# Altium PCB LMG1210BOB.PcbDoc
Units mil, origin at the board's own origin, x right, y up, seen from the top; angles counter-clockwise.
Board outline 700 x 1200 mil, 2 copper layers (Top Layer, Bottom Layer), stack 61.756 mil thick; 3 components, 26 nets, 43 pads, 0 vias.
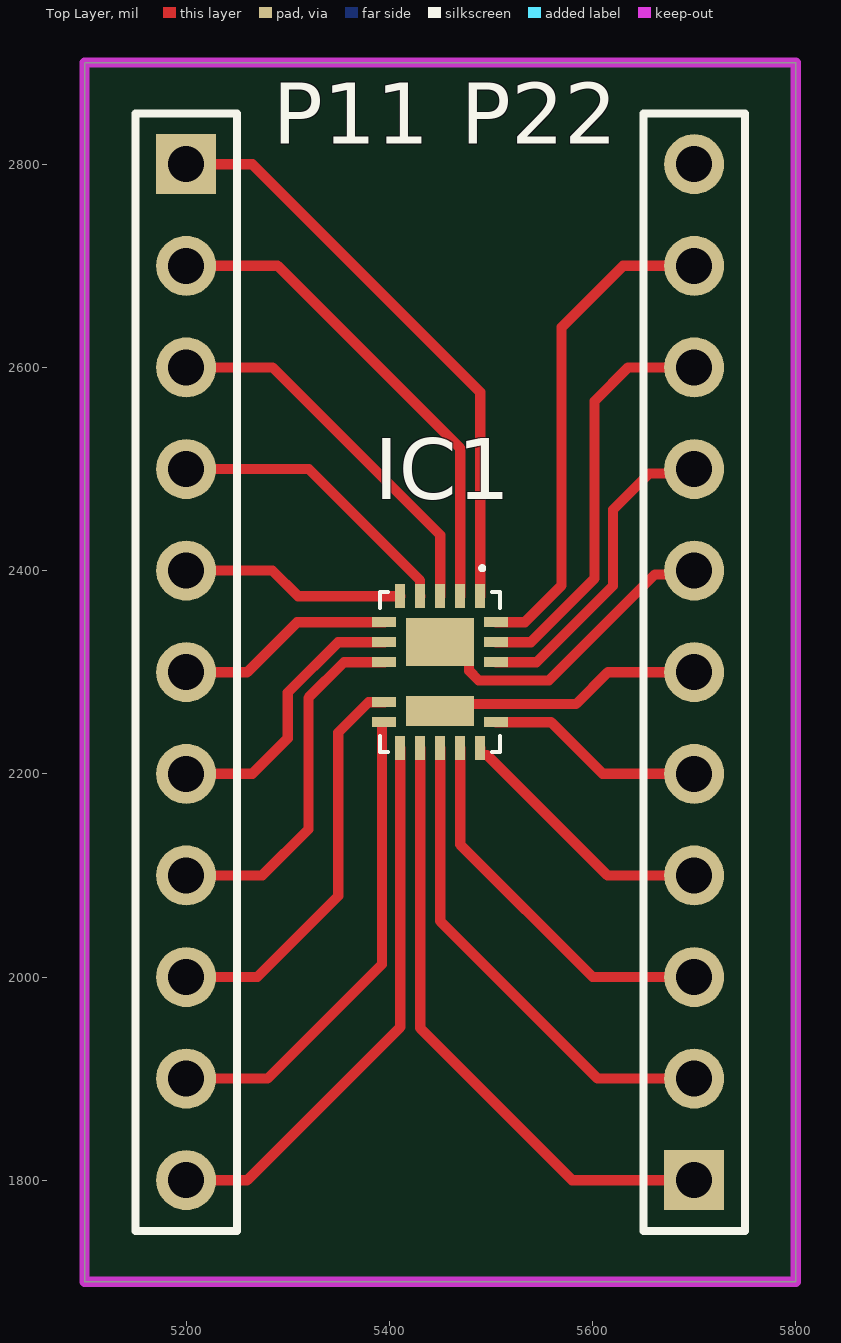
[diagram p0: Top Layer view]
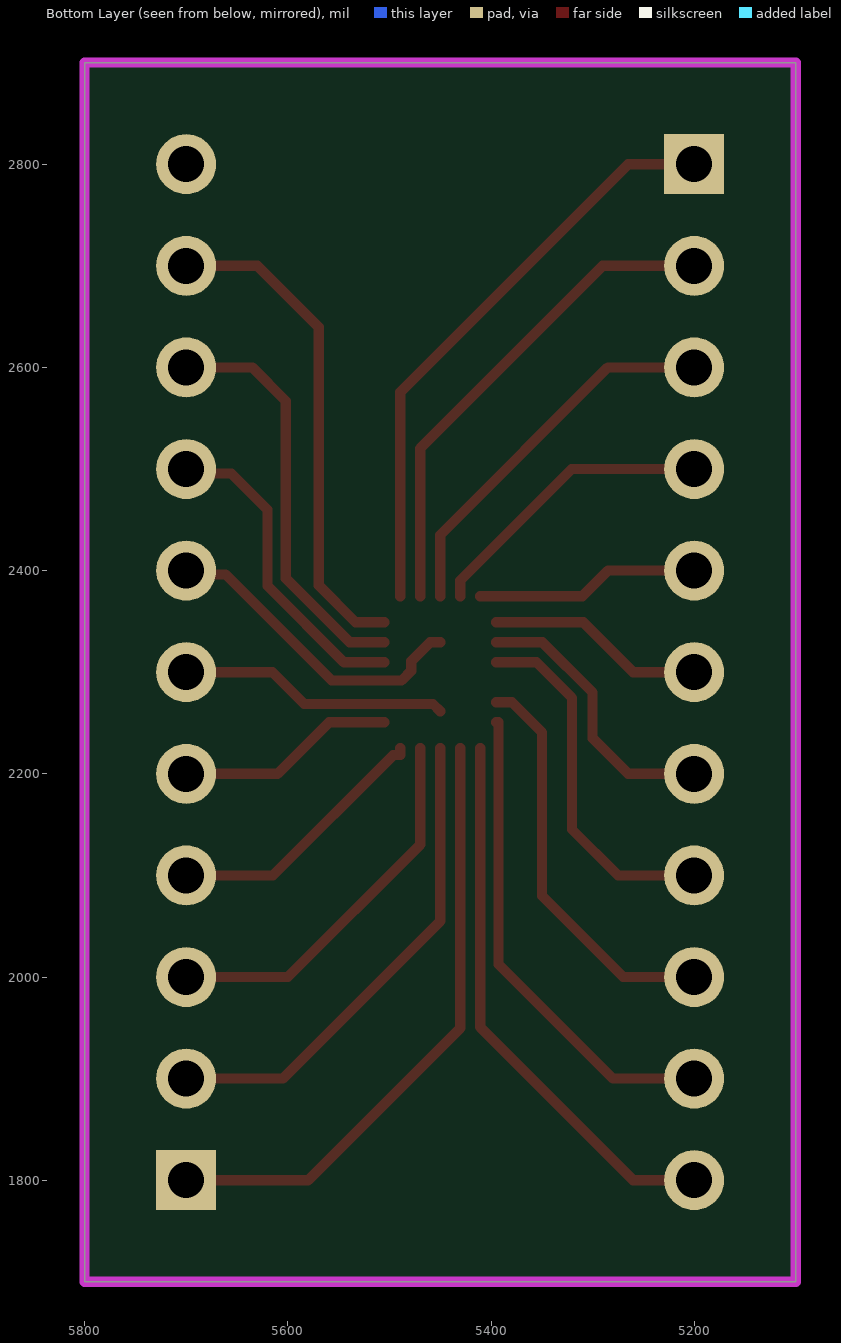
[diagram p1: Bottom Layer view, seen from below]

## Layer stack, top to bottom
Top Solder: solder mask 1, SM-001, Dk 4
Top Layer: signal copper 1.378
Dielectric 1: core 59, Core-043, Dk 4.3
Bottom Layer: signal copper 1.378
Bottom Solder: solder mask 1, SM-001, Dk 4

## Board outline
5100,1700 5800,1700 5800,2900 5100,2900

## Design rules (kind name [scope] priority, off if disabled: settings)
BoardOutlineClearance [All] p1: gap=7.87 ignorepadtopadclearanceinfootprint=FALSE except(15.75: Arc-SplitBarrior Arc-SplitContinuation Track-SplitBarrior Track-SplitContinuation SMDPad-SplitBarrior SMDPad-SplitContinuation THPad-SplitBarrior THPad-SplitContinuation Via-SplitBarrior Via-SplitContinuation Fill-SplitBarrior Fill-SplitContinuation Poly-SplitBarrior Poly-SplitContinuation Region-SplitBarrior Region-SplitContinuation Text-SplitBarrior Text-SplitContinuation)
Clearance "Clearance Bottom Layer" [OnLayer('Bottom Layer')] p1: gap=8 ignorepadtopadclearanceinfootprint=TRUE except(10: Arc-Text Track-Text SMDPad-Text THPad-Text Via-Text Fill-Text Poly-Text Region-Text Text-Text)
Clearance "Clearance Top Layer" [OnLayer('Top Layer')] p2: gap=8 ignorepadtopadclearanceinfootprint=TRUE except(10: Arc-Text Track-Text SMDPad-Text THPad-Text Via-Text Fill-Text Poly-Text Region-Text Text-Text)
Clearance [All] p3: gap=7.87 ignorepadtopadclearanceinfootprint=FALSE except(3.5: Arc-Arc Arc-Track Arc-SMDPad Track-Track Track-SMDPad SMDPad-SMDPad; 5: Arc-Via Track-Via SMDPad-Via THPad-Via Via-Via; 10: Arc-Text Track-Text SMDPad-Text THPad-Text Via-Text Fill-Text Poly-Text Region-Text Text-Text)
HoleSize [All] p1: absolutevalues=TRUE maxlimit=248.03 minlimit=7.87 maxpercent=80.000 minpercent=20.000
MinimumAnnularRing [All] p1: minimumring=3
MinimumSolderMaskSliver [All] p1: minsoldermaskwidth=3.94
PolygonConnect PolygonConnect_1 [All] p1: thpad.connectstyle=Relief thpad.reliefconductorwidth=20 thpad.reliefentries=4 thpad.polygonreliefangle="90 Angle" thpad.airgapwidth=10 smdpad.connectstyle=Relief smdpad.reliefconductorwidth=20 smdpad.reliefentries=4 smdpad.polygonreliefangle="90 Angle" smdpad.airgapwidth=10 via.connectstyle=Direct via.reliefconductorwidth=20 via.reliefentries=4 via.polygonreliefangle="90 Angle" via.airgapwidth=10
RoutingCorners [All] p1: cornerstyle=Round minsetback=100 maxsetback=100
RoutingVias [All] p1: holewidth=19.68 width=39.37 viastyle="Through Hole" minholewidth=7.87 minwidth=17.72 maxholewidth=39.37 maxwidth=78.74
SilkToSilkClearance [All] p1: silktosilkclearance=3.94
SilkToSolderMaskClearance [IsPad] p1: minsilkscreentomaskgap=3.94 clearancetoexposedcopper=TRUE
SolderMaskExpansion [All] p1: expansion=4 istentingtop=FALSE
Width [All] p1: maxlimit=100 minlimit=3.5 preferedwidth=10
25 further rules are at their usual default settings.

## Components (designator, comment, footprint, x,y, rotation, side; value= is the part's Value field where it differs from the comment)
IC1 "LMG1210RVRR" LMG1210RVRR 5450,2300 r270 top
P11 "Header 11" HDR1X11 5200,2800 r270 top
P22 "Header 11" HDR1X11 5700,1800 r90 top

## Footprints (in the part's own frame and the unit in brackets; to place one, negate y for a bottom-side part, rotate by r counter-clockwise, add the part's x,y. Pads: shape width x height; smd on the part's side, far side on the other; paste and mask are expansions set on the pad)
HDR1X11 [mm] "Connector; Header; 11 Position"
  rect 1.5x1.5 hole 0.9: 1(0,0)
  round 1.5 hole 0.9: 2(2.54,0) 3(5.08,0) 4(7.62,0) 5(10.16,0) 6(12.7,0) 7(15.24,0) 8(17.78,0) 9(20.32,0) 10(22.86,0) 11(25.4,0)
  silkscreen extent -1.27,-1.27 26.67,1.27
LMG1210RVRR [mm]
  rect 0.6x0.25 smd: 1(-1.9,1) 2(-1.9,0.5) 3(-1.9,0) 4(-1.9,-0.5) 5(-1.9,-1) 11(1.9,-1) 12(1.9,-0.5) 13(1.9,0) 14(1.9,0.5) 15(1.9,1)
  rect 0.25x0.6 smd: 6(-1.25,-1.4) 7(-0.75,-1.4) 8(-0.25,-1.4) 9(0.75,-1.4) 10(1.25,-1.4) 16(1.25,1.4) 17(-0.25,1.4) 18(-0.75,1.4) 19(-1.25,1.4)
  rect 1.2x1.7 smd: 20(-0.75,0)
  rect 0.75x1.7 smd: 21(0.975,0)
  silkscreen extent -2.65,-1.5 2,1.5, body extent -2,-1.5 2,1.5, height 0.9

## Part data
IC1: "Integrated Circuit", Manufacturer_Name="Texas Instruments", Mouser Part Number=595-LMG1210RVRR, Arrow Part Number=LMG1210RVRR, Arrow Price/Stock=https://www.arrow.com/en/products/lmg1210rvrr/texas-instruments, Datasheet Link=http://www.ti.com/lit/ds/symlink/lmg1210.pdf, Height=0.8mm, Manufacturer_Part_Number=LMG1210RVRR, Mouser Price/Stock=https://www.mouser.co.uk/ProductDetail/Texas-Instruments/LMG1210RVRR?qs=r5DSvlrkXmKqI241KOY62g%3D%3D
P11 P22: "Header, 11-Pin", LatestRevisionDate=17-Jul-2002, LatestRevisionNote="Re-released for DXP Platform.", Publisher="Altium Limited"

## Nets (pads, with @x,y where several pads share a name; then routed paths per layer and width w, separated by ;. In a path a pad name is that pad's centre, name@x,y a point inside that pad or via, vN(x,y) a via of type N, cw(c..) or ccw(c..) an arc to the next point about the centre after c; other vN are vias at no path point)
NetIC1_1: IC1.1 P11.1 | length 583.1
  Top Layer w10: P11.1 5265,2800 5489.37,2575.63 IC1.1
NetIC1_2: IC1.2 P11.2 | length 489.6
  Top Layer w10: P11.2 5290,2700 5469.69,2520.31 IC1.2
NetIC1_3: IC1.3 P11.3 | length 378.5
  Top Layer w10: P11.3 5285,2600 5450,2435 IC1.3
NetIC1_4: IC1.4 P11.4 | length 291.2
  Top Layer w10: P11.4 5320.55,2500 5430.24,2390.31 5430.24,2374.88 IC1.4
NetIC1_5: IC1.5 P11.5 | length 221.1
  Top Layer w10: P11.5 5285,2400 5310.2,2374.8 IC1.5
NetIC1_6: IC1.6 P11.6 | length 215.3
  Top Layer w10: P11.6 5260,2300 5309.21,2349.21 IC1.6
NetIC1_7: IC1.7 P11.7 | length 274.9
  Top Layer w10: P11.7 5265,2200 5300,2235 5300,2280 5349.53,2329.53 IC1.7
NetIC1_8: IC1.8 P11.8 | length 357.7
  Top Layer w10: P11.8 5275,2100 5320.23,2145.23 5320.23,2274.77 5355.3,2309.84 IC1.8
NetIC1_9: IC1.9 P11.9 | length 401.2
  Top Layer w10: P11.9 5270,2000 5349.69,2079.69 5349.69,2240.71 5379.37,2270.39 5394.8,2270.39 IC1.9
NetIC1_10: IC1.10 P11.10 | length 479.6
  Top Layer w10: P11.10 5280,1900 5392.63,2012.63 5392.63,2250.71 5392.71,2250.79 IC1.10
NetIC1_11: IC1.11 P11.11 | length 547.6
  Top Layer w10: P11.11 5260,1800 5410.63,1950.63 IC1.11
NetIC1_12: IC1.12 P22.1 | length 607.2
  Top Layer w10: IC1.12 5430.32,1949.68 5580,1800 P22.1
NetIC1_13: IC1.13 P22.2 | length 484.4
  Top Layer w10: IC1.13 5450,2055 5605,1900 P22.2
NetIC1_14: IC1.14 P22.3 | length 379.2
  Top Layer w10: IC1.14 5469.69,2130.31 5600,2000 P22.3
NetIC1_15: IC1.15 P22.4 | length 266.4
  Top Layer w10: IC1.15 5489.37,2218.46 5489.45,2218.38 5496.18,2218.38 5614.57,2100 P22.4
NetIC1_16: IC1.16 P22.5 | length 215.9
  Top Layer w10: IC1.16 5559.21,2250.79 5610,2200 P22.5
NetIC1_17: IC1.17 P22.8 | length 317.6
  Top Layer w10: IC1.17 5544.84,2309.84 5620,2385 5620,2460 5655.47,2495.47 5695.47,2495.47 P22.8
NetIC1_18: IC1.18 P22.9 | length 409.2
  Top Layer w10: IC1.18 5539.07,2329.53 5602,2392.46 5602,2567 5635,2600 P22.9
NetIC1_19: IC1.19 P22.10 | length 489
  Top Layer w10: IC1.19 5533.3,2349.21 5569.54,2385.46 5569.54,2639.54 5630,2700 P22.10
NetIC1_20: IC1.20 P22.7 | length 316
  Top Layer w10: IC1.20 5459.84,2329.53 5478.46,2310.91 5478.46,2301.38 5488,2291.84 5556.84,2291.84 5661.33,2396.33 5696.33,2396.33 P22.7
NetIC1_21: IC1.21 P22.6 | length 265.9
  Top Layer w10: IC1.21 5457.17,2268.79 5583.79,2268.79 5615,2300 P22.6
NetP1_1: 
NetP1_2: 
NetP1_3: 
NetP1_4: 
NetP2_1: 
pads on no net: P22.11

## Keep-outs
Keep-Out Layer:
  the board outline again, w10

## Silkscreen, mask and mechanical layers (free items; w line width, h text height)
Board:
  the board outline again, w10